# Altium PCB Motor Controller_v0.PcbDoc
Units mm, origin at the board's own origin, x right, y up, seen from the top; angles counter-clockwise.
Board outline 57 x 53.13 mm, 2 copper layers (Top Layer, Bottom Layer); 15 components, 31 nets, 110 pads, 18 vias.
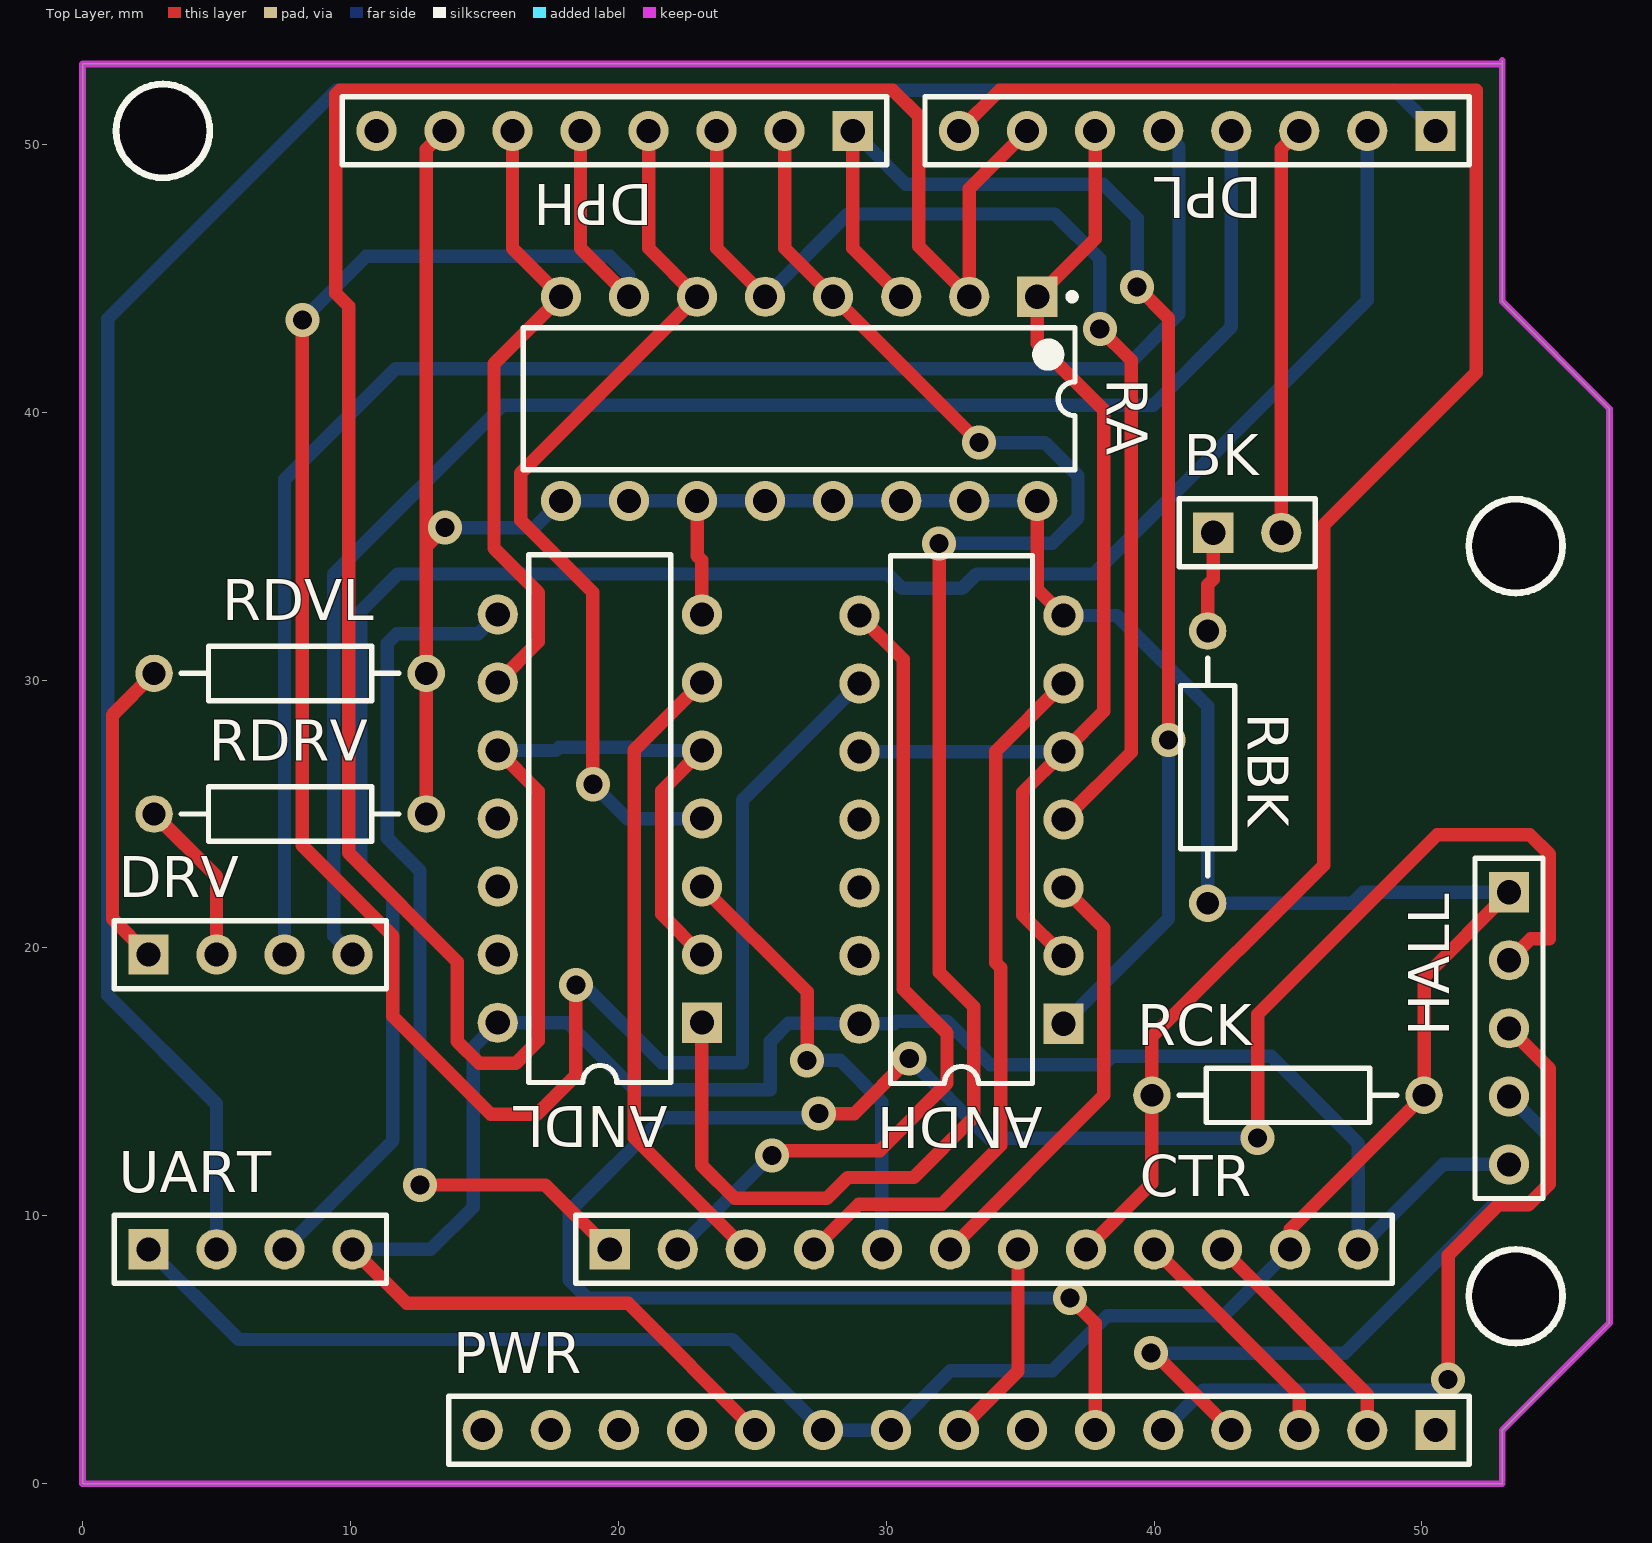
[diagram p0: Top Layer view]
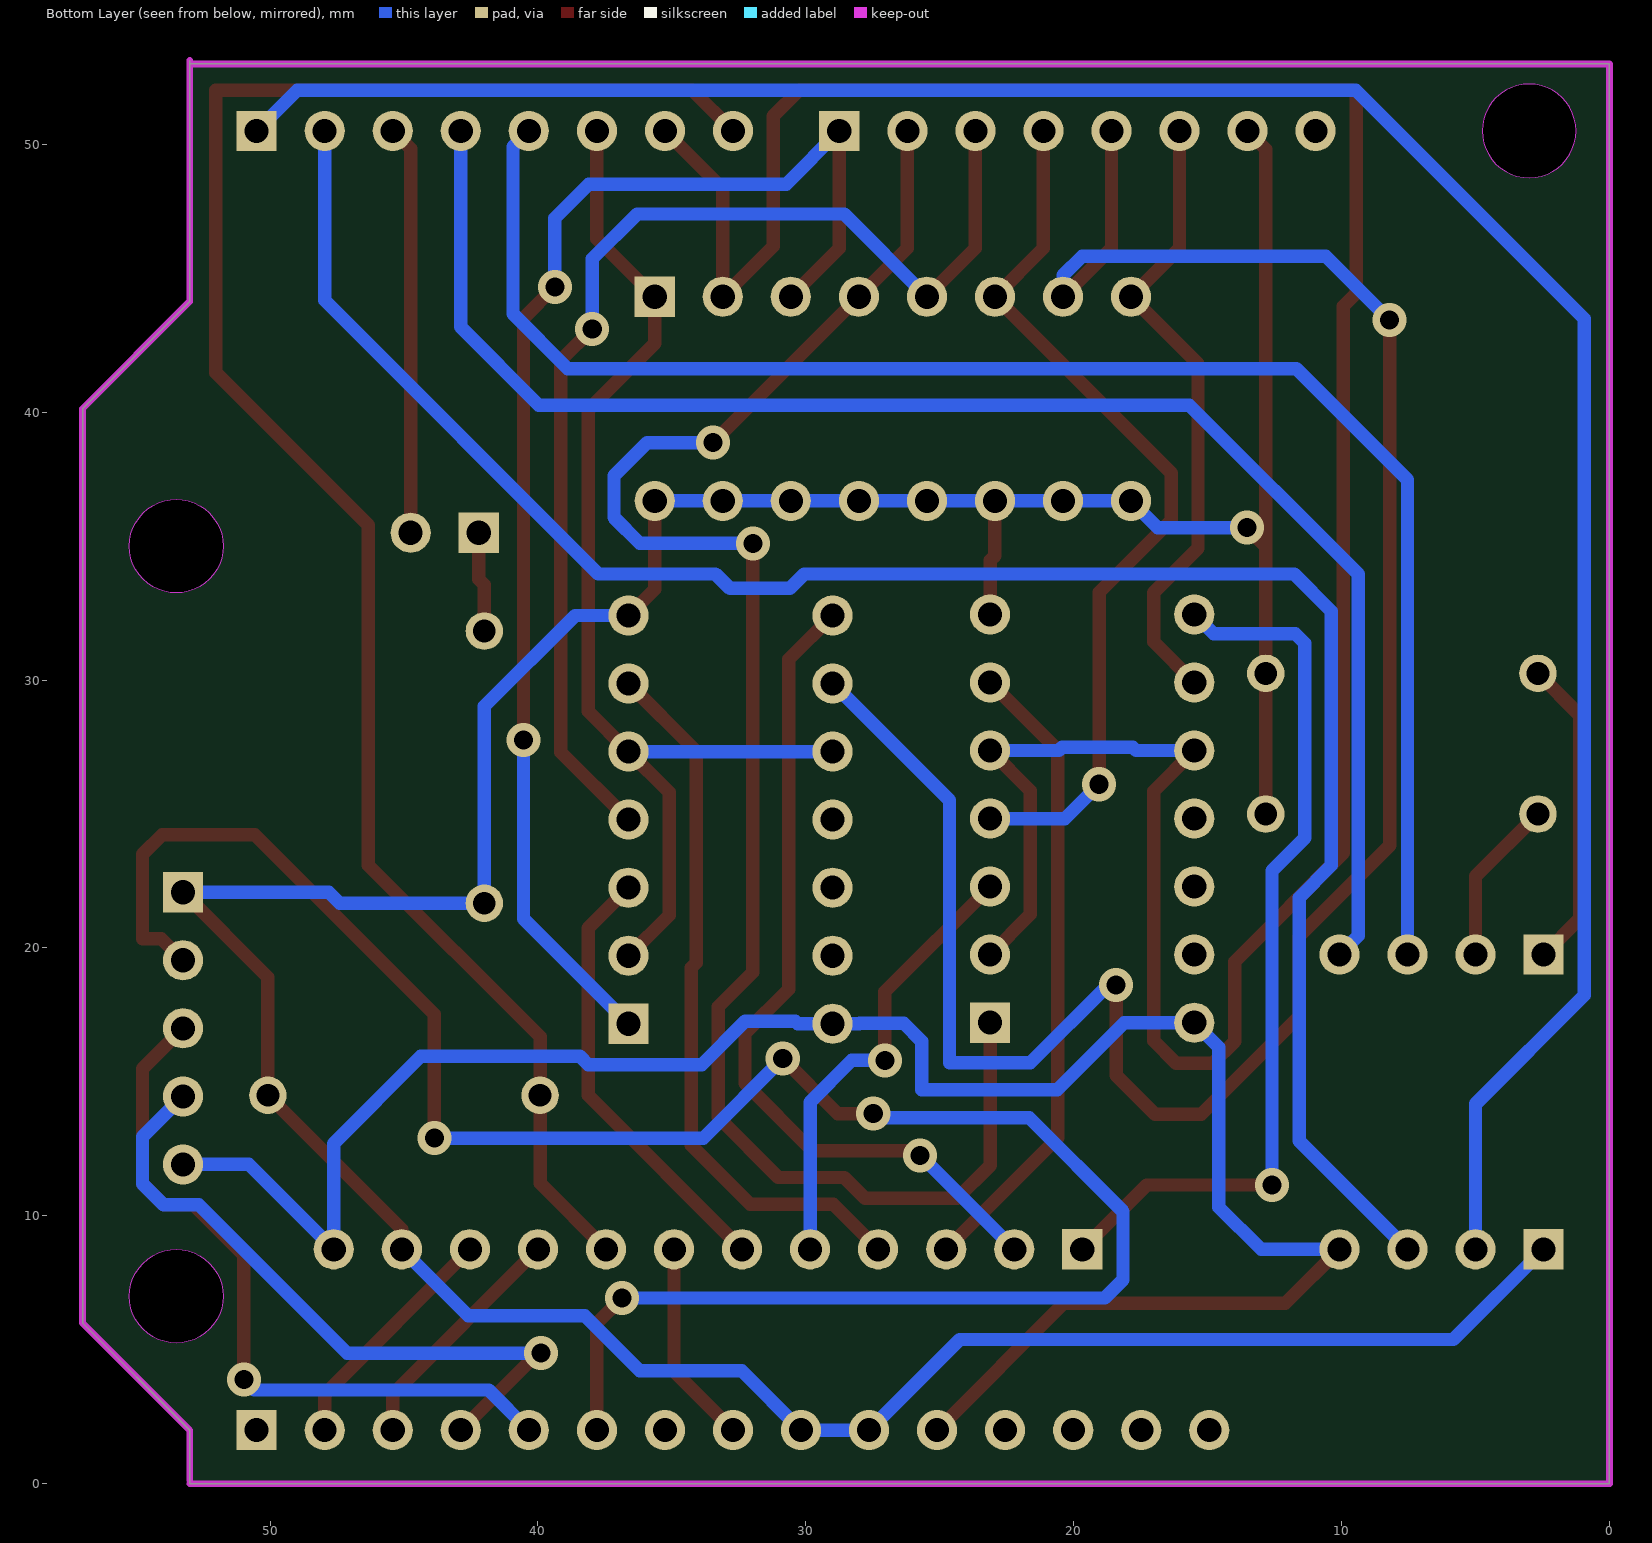
[diagram p1: Bottom Layer view, seen from below]

## Layer stack, top to bottom
Top Solder: solder mask 0.0102, Solder Resist, Dk 3.5
Top Layer: signal copper 0.0356
Dielectric 1: dielectric 0.32, FR-4, Dk 4.8
Bottom Layer: signal copper 0.0356
Bottom Solder: solder mask 0.0102, Solder Resist, Dk 3.5

## Board outline
0,0 0,53 53,53 53,53.127 53,44.127 57,40.127 57,6 53,2 53,0
cut-out: 51.75,7 ccw(c53.5,7) 53.5,5.25 ccw(c53.5,7) 55.25,7 ccw(c53.5,7) 53.5,8.75 ccw(c53.5,7)
cut-out: 51.75,35 ccw(c53.5,35) 53.5,33.25 ccw(c53.5,35) 55.25,35 ccw(c53.5,35) 53.5,36.75 ccw(c53.5,35)
cut-out: 3,48.75 cw(c3,50.5) 1.25,50.5 cw(c3,50.5) 3,52.25 cw(c3,50.5) 4.75,50.5 cw(c3,50.5)

## Design rules (kind name [scope] priority, off if disabled: settings)
Clearance [All] p1: gap=0.5 ignorepadtopadclearanceinfootprint=FALSE
PolygonConnect [All] p1: connectstyle=Relief reliefconductorwidth=0.254 reliefentries=4 polygonreliefangle="90 Angle" airgapwidth=0.254
RoutingVias [All] p1: holewidth=0.711 width=1.27 viastyle="Through Hole" minholewidth=0.711 minwidth=1.27 maxholewidth=0.711 maxwidth=1.27
SolderMaskExpansion [All] p1: expansion=0.102 istentingtop=FALSE
Width [All] p1: maxlimit=1 minlimit=0.254 preferedwidth=0.5
30 further rules are at their usual default settings.

## Components (designator, comment, footprint, x,y, rotation, side; value= is the part's Value field where it differs from the comment)
ANDH "SN74ALS08N" N014 32.81,24.79 r90 top
ANDL "SN74ALS08N" N014 19.31,24.83 r90 top
BK "Header 2" HDR1X2 42.21,35.5 r0 top
CTR "Header 12" HDR1X12 19.68,8.75 r0 top
DPH "Header 8" HDR1X8 28.75,50.5 r180 top
DPL "Header 8" HDR1X8 50.5,50.5 r180 top
DRV "Header 4" HDR1X4 2.46,19.75 r0 top
HALL "Header 5" HDR1X5 53.25,22.08 r270 top
PWR "Header 15" HDR1X15 50.5,2 r180 top
RA "Res Pack2" DIP-16 26.75,40.5 r270 top value=1K
RBK "Res2" AXIAL-0.4 42,26.75 r90 top value=1K
RCK "Res2" AXIAL-0.4 45,14.5 r180 top value=1K
RDRV "Res2" AXIAL-0.4 7.75,25 r180 top value=1K
RDVL "Res2" AXIAL-0.4 7.75,30.25 r180 top value=220
UART "Header 4" HDR1X4 2.46,8.75 r0 top

## Footprints (in the part's own frame and the unit in brackets; to place one, negate y for a bottom-side part, rotate by r counter-clockwise, add the part's x,y. Pads: shape width x height; smd on the part's side, far side on the other; paste and mask are expansions set on the pad)
AXIAL-0.4 [mm] "Axial Device, Thru-Hole; 2 Leads; 0.4 in Pin Spacing"
  round 1.4 hole 0.85: 1(-5.08,0) 2(5.08,0)
  silkscreen extent -4.06,-1.02 4.06,1.02
DIP-16 [mm] "DIP; 16 Leads; Row Spacing 7.62 mm; Pitch 2.54 mm"
  rect 1.5x1.5 hole 0.9: 1(-3.81,8.89)
  round 1.5 hole 0.9: 2(-3.81,6.35) 3(-3.81,3.81) 4(-3.81,1.27) 5(-3.81,-1.27) 6(-3.81,-3.81) 7(-3.81,-6.35) 8(-3.81,-8.89) 9(3.81,-8.89) 10(3.81,-6.35) 11(3.81,-3.81) 12(3.81,-1.27) 13(3.81,1.27) 14(3.81,3.81) 15(3.81,6.35) 16(3.81,8.89)
  silkscreen extent -3.93,-10.3 2.65,10.32, body extent -3.6,-10.28 3.6,10.28, height 5.08
HDR1X2 [mm] "Connector; Header; 2 Position"
  rect 1.5x1.5 hole 0.9: 1(0,0)
  round 1.5 hole 0.9: 2(2.54,0)
  silkscreen extent -1.27,-1.27 3.81,1.27
HDR1X4 [mm] "Connector; Header; 4 Position"
  rect 1.5x1.5 hole 0.9: 1(0,0)
  round 1.5 hole 0.9: 2(2.54,0) 3(5.08,0) 4(7.62,0)
  silkscreen extent -1.27,-1.27 8.89,1.27
HDR1X5 [mm] "Connector; Header; 5 Position"
  rect 1.5x1.5 hole 0.9: 1(0,0)
  round 1.5 hole 0.9: 2(2.54,0) 3(5.08,0) 4(7.62,0) 5(10.16,0)
  silkscreen extent -1.27,-1.27 11.43,1.27
HDR1X8 [mm] "Connector; Header; 8 Position"
  rect 1.5x1.5 hole 0.9: 1(0,0)
  round 1.5 hole 0.9: 2(2.54,0) 3(5.08,0) 4(7.62,0) 5(10.16,0) 6(12.7,0) 7(15.24,0) 8(17.78,0)
  silkscreen extent -1.27,-1.27 19.05,1.27
HDR1X12 [mm] "Connector; Header; 12 Position"
  rect 1.5x1.5 hole 0.9: 1(0,0)
  round 1.5 hole 0.9: 2(2.54,0) 3(5.08,0) 4(7.62,0) 5(10.16,0) 6(12.7,0) 7(15.24,0) 8(17.78,0) 9(20.32,0) 10(22.86,0) 11(25.4,0) 12(27.94,0)
  silkscreen extent -1.27,-1.27 29.21,1.27
HDR1X15 [mm] "Connector; Header; 15 Position"
  rect 1.5x1.5 hole 0.9: 1(0,0)
  round 1.5 hole 0.9: 2(2.54,0) 3(5.08,0) 4(7.62,0) 5(10.16,0) 6(12.7,0) 7(15.24,0) 8(17.78,0) 9(20.32,0) 10(22.86,0) 11(25.4,0) 12(27.94,0) 13(30.48,0) 14(33.02,0) 15(35.56,0)
  silkscreen extent -1.27,-1.27 36.83,1.27
N014 [mm] "DIP; 14 Leads; Row Spacing 7.62 mm; Pitch 2.54 mm"
  rect 1.5x1.5 hole 0.9: 1(-7.62,-3.81)
  round 1.5 hole 0.9: 2(-5.08,-3.81) 3(-2.54,-3.81) 4(0,-3.81) 5(2.54,-3.81) 6(5.08,-3.81) 7(7.62,-3.81) 8(7.62,3.81) 9(5.08,3.81) 10(2.54,3.81) 11(0,3.81) 12(-2.54,3.81) 13(-5.08,3.81) 14(-7.62,3.81)
  silkscreen extent -9.85,-2.65 9.85,2.65

## Part data
ANDH ANDL: "Quadruple 2-Input Positive-AND Gate", ComponentLink1Description="Manufacturer Link", ComponentLink1URL=http://www.ti.com/, ComponentLink2Description=Datasheet, ComponentLink2URL=http://www-s.ti.com/sc/ds/sn74als08.pdf, ComponentLink3Description="Packaging Specification", ComponentLink3URL=http://focus.ti.com/lit/ml/mpdi002c/mpdi002c.pdf, DatasheetVersion=Dec-1994, LatestRevisionDate=04-Mar-2005, LatestRevisionNote="Stylized 3D Model Added.", PackageDescription="DIP; 14 Leads; Row Spacing 7.62 mm; Pitch 2.54 mm", PackageReference=N014, PackageVersion=Oct-1995, Published=8-Jun-2000, Publisher="Altium Limited"
BK: "Header, 2-Pin", LatestRevisionDate=17-Jul-2002, LatestRevisionNote="Re-released for DXP Platform.", Publisher="Altium Limited"
CTR: "Header, 12-Pin", LatestRevisionDate=17-Jul-2002, LatestRevisionNote="Re-released for DXP Platform.", Publisher="Altium Limited"
DPH DPL: "Header, 8-Pin", LatestRevisionDate=17-Jul-2002, LatestRevisionNote="Re-released for DXP Platform.", Publisher="Altium Limited"
DRV UART: "Header, 4-Pin", LatestRevisionDate=17-Jul-2002, LatestRevisionNote="Re-released for DXP Platform.", Publisher="Altium Limited"
HALL: "Header, 5-Pin", LatestRevisionDate=17-Jul-2002, LatestRevisionNote="Re-released for DXP Platform.", Publisher="Altium Limited"
PWR: "Header, 15-Pin", LatestRevisionDate=17-Jul-2002, LatestRevisionNote="Re-released for DXP Platform.", Publisher="Altium Limited"
RA: "Isolated Resistor Network - Parts", Code_JEDEC=MO-001-AC, LatestRevisionDate=17-Jul-2002, LatestRevisionNote="Re-released for DXP Platform.", PackageReference=DIP-16, Published=24-Mar-1999, Publisher="Altium Limited", Sim Note="Enter the Resistance value into parameter field."
RBK RCK RDRV RDVL: "Resistor", LatestRevisionDate=17-Jul-2002, LatestRevisionNote="Re-released for DXP Platform.", PackageDescription="Axial Device, Thru-Hole; 2 Leads; 0.4 in Pin Spacing", PackageReference=AXIAL-0.4, Published=8-Jun-2000, Publisher="Altium Limited"

## Via types
v1: diameter 1.27, hole 0.711, Top Layer to Bottom Layer, 18 vias

## Nets (pads, with @x,y where several pads share a name; then routed paths per layer and width w, separated by ;. In a path a pad name is that pad's centre, name@x,y a point inside that pad or via, vN(x,y) a via of type N, cw(c..) or ccw(c..) an arc to the next point about the centre after c; other vN are vias at no path point)
BK_SW: BK.2 DPL.3 | length 15.3
  Top Layer w0.5: BK.2 44.75,49.83 DPL.3
BVS: CTR.9 PWR.3 | length 9
  Top Layer w0.5: CTR.9 45.42,3.33 PWR.3
CK: CTR.8 DPL.8 RCK.2 | length 69.2
  Top Layer w0.5: DPL.8 34.239,52.019 52.019,52.019 52.019,41.478 46.33,35.789 46.33,23.089 39.92,16.679 RCK.2 39.92,11.21 CTR.8
CS: CTR.10 PWR.2 | length 9
  Top Layer w0.5: CTR.10 47.96,3.33 PWR.2
DRIVE_LED: DPL.5 DRV.3 | length 60.8
  Bottom Layer w0.5: DRV.3 7.54,37.474 11.684,41.617 38.881,41.617 40.932,43.668 40.932,49.908 DPL.5
DRIVE_SW: DPL.4 DRV.4 | length 59.1
  Bottom Layer w0.5: DRV.4 9.38,20.45 9.38,33.96 15.683,40.263 39.963,40.263 42.88,43.18 DPL.4
GND: ANDH.7 ANDL.7 CTR.11 DPH.7 HALL.1 PWR.9 PWR.10 RA.9 RA.10 RA.11 RA.12 RA.13 RA.14 RA.15 RA.16 RBK.1 RCK.1 RDRV.1 RDVL.1 UART.1 | length 148.8
  Top Layer w0.5: RDRV.1 RDVL.1 12.83,34.979 ; DPH.7 12.83,49.82 12.83,34.979 ; v1(13.538,35.687) 12.83,34.979 ; RA.11 22.94,34.648 23.12,34.468 ANDL.7 ; RA.16 35.64,33.39 ANDH.7 ; CTR.11 45.08,9.5 RCK.1 50.08,18.91 HALL.1
  Bottom Layer w0.5: UART.1 5.825,5.385 24.255,5.385 PWR.10 PWR.9 32.396,4.216 36.195,4.216 38.252,6.274 42.604,6.274 CTR.11 ; v1(13.538,35.687) 16.857,35.687 RA.9 RA.10 RA.11 RA.12 RA.13 RA.14 RA.15 RA.16 ; ANDH.7 38.608,32.41 42,29.018 RBK.1 47.396,21.67 47.806,22.08 HALL.1
HAU: HALL.2 PWR.6 | length 79.7
  Top Layer w0.5: v1(27.483,13.818) 28.804,13.818 v1(30.861,15.875) ; v1(36.855,6.934) 37.8,5.99 PWR.6 ; v1(43.866,12.903) 43.866,17.526 50.571,24.232 54.026,24.232 54.762,23.495 54.762,20.345 54.055,20.345 HALL.2
  Bottom Layer w0.5: v1(27.483,13.818) 27.33,13.665 21.666,13.665 18.161,10.16 18.161,7.62 18.847,6.934 v1(36.855,6.934) ; v1(30.861,15.875) 33.833,12.903 v1(43.866,12.903)
HAV: HALL.3 PWR.5 | length 27.4
  Top Layer w0.5: v1(50.978,3.886) 50.978,8.534 52.857,10.414 53.975,10.414 54.762,11.201 54.762,15.488 HALL.3
  Bottom Layer w0.5: PWR.5 41.84,3.5 50.592,3.5 v1(50.978,3.886)
HAW: HALL.4 PWR.4 | length 25.6
  Top Layer w0.5: v1(39.878,4.877) 40.003,4.877 PWR.4
  Bottom Layer w0.5: v1(39.878,4.877) 47.117,4.877 52.654,10.414 53.975,10.414 54.762,11.201 54.762,12.948 HALL.4
NetBK_1: BK.1 RBK.2 | length 3.8
  Top Layer w0.5: RBK.2 42,33.553 42.21,33.763 BK.1
NetDRV_1: DRV.1 RDVL.2 | length 11.7
  Top Layer w0.5: DRV.1 1.118,21.092 1.118,28.698 RDVL.2
NetDRV_2: DRV.2 RDRV.2 | length 6.2
  Top Layer w0.5: RDRV.2 5,22.67 DRV.2
PWMH: ANDH.2 ANDH.5 ANDH.10 DPL.6 RA.1 | length 42.2
  Top Layer w0.5: ANDH.2 35.103,21.227 35.103,25.813 ANDH.5 38.125,28.835 38.125,40.08 35.64,42.565 RA.1 37.8,46.47 DPL.6
  Bottom Layer w0.5: ANDH.10 ANDH.5
PWML: ANDL.2 ANDL.5 ANDL.10 DPL.7 RA.2 | length 105.8
  Top Layer w0.5: ANDL.10 17.018,25.852 17.018,16.535 16.18,15.697 14.808,15.697 13.995,16.51 13.995,19.482 9.931,23.546 9.931,43.952 9.449,44.434 9.449,51.867 9.601,52.019 30.251,52.019 31.217,51.054 31.217,46.193 RA.2 33.1,48.34 DPL.7 ; ANDL.2 21.615,21.255 21.615,25.865 ANDL.5
  Bottom Layer w0.5: ANDL.10 17.665,27.37 17.791,27.496 20.435,27.496 20.561,27.37 ANDL.5
RX: DPL.1 UART.2 | length 90.1
  Bottom Layer w0.5: UART.2 5,14.177 0.94,18.237 0.94,43.485 9.474,52.019 48.981,52.019 DPL.1
TX: DPL.2 UART.3 | length 75.2
  Bottom Layer w0.5: UART.3 11.582,12.792 11.582,21.879 10.38,23.081 10.38,32.571 11.769,33.96 30.061,33.96 30.601,33.42 32.831,33.42 33.371,33.96 37.744,33.96 47.96,44.175 DPL.2
UH: ANDH.1 DPH.1 RA.3 | length 51.1
  Top Layer w0.5: DPH.1 28.75,46.12 RA.3 ; v1(39.37,44.679) 40.538,43.51 v1(40.538,27.762)
  Bottom Layer w0.5: DPH.1 30.736,48.514 38.1,48.514 39.37,47.244 v1(39.37,44.679) ; ANDH.1 40.538,21.088 v1(40.538,27.762)
UHG: ANDH.3 CTR.6 | length 16.5
  Top Layer w0.5: CTR.6 38.125,14.495 38.125,20.745 ANDH.3
UL: ANDL.1 DPH.2 RA.4 | length 65.2
  Top Layer w0.5: ANDL.1 23.12,11.88 24.345,10.655 27.79,10.655 28.568,11.433 31.024,11.433 33.27,13.678 33.27,17.808 31.979,19.099 v1(31.979,35.103) ; DPH.2 26.21,46.12 RA.4 v1(33.468,38.862)
  Bottom Layer w0.5: v1(31.979,35.103) 36.195,35.103 37.16,36.068 37.16,37.631 35.929,38.862 v1(33.468,38.862)
ULG: ANDL.3 CTR.5 | length 17
  Top Layer w0.5: ANDL.3 27.051,18.359 v1(27.051,15.806)
  Bottom Layer w0.5: v1(27.051,15.806) 28.283,15.806 29.84,14.249 CTR.5
VCC: ANDH.14 ANDL.14 CTR.12 HALL.5 PWR.11 UART.4 | length 78.6
  Top Layer w0.5: UART.4 12.099,6.731 20.369,6.731 PWR.11
  Bottom Layer w0.5: UART.4 13.005,8.75 14.58,10.325 14.58,16.29 ANDL.14 18.12,17.21 20.62,14.71 25.666,14.71 25.666,16.51 26.347,17.191 27.985,17.191 28.006,17.17 ANDH.14 30.306,17.17 30.398,17.263 32.27,17.263 33.886,15.646 38.125,15.646 38.43,15.951 44.369,15.951 47.62,12.7 CTR.12 50.79,11.92 HALL.5
VH: ANDH.4 DPH.3 RA.5 | length 43.9
  Top Layer w0.5: DPH.3 23.67,46.12 RA.5 ; ANDH.4 39.141,27.311 39.141,41.935 v1(37.973,43.104)
  Bottom Layer w0.5: RA.5 28.566,47.396 36.297,47.396 37.973,45.72 v1(37.973,43.104)
VHG: ANDH.6 CTR.4 | length 26.9
  Top Layer w0.5: CTR.4 28.983,10.433 32.07,10.433 34.27,12.633 34.27,19.263 34.087,19.446 34.087,27.337 ANDH.6
VIN: CTR.7 PWR.8 | length 7.7
  Top Layer w0.5: PWR.8 34.92,4.2 CTR.7
VL: ANDL.4 DPH.4 RA.6 | length 33.6
  Top Layer w0.5: v1(19.05,26.111) 19.05,33.274 16.36,35.964 16.36,37.73 RA.6 21.13,46.12 DPH.4
  Bottom Layer w0.5: v1(19.05,26.111) 20.331,24.83 ANDL.4
VLG: ANDL.6 CTR.3 | length 23.9
  Top Layer w0.5: ANDL.6 20.599,27.389 20.599,12.911 CTR.3
WH: ANDH.9 DPH.5 RA.7 | length 84.3
  Top Layer w0.5: v1(8.204,43.434) 8.204,23.825 11.582,20.447 11.582,17.45 15.24,13.792 16.967,13.792 18.415,15.24 v1(18.415,18.618) ; DPH.5 18.59,46.12 RA.7
  Bottom Layer w0.5: v1(8.204,43.434) 10.592,45.822 19.685,45.822 20.4,45.107 RA.7 ; v1(18.415,18.618) 18.707,18.618 21.615,15.71 24.638,15.71 24.638,25.508 ANDH.9
WHG: ANDH.8 CTR.2 | length 31.4
  Top Layer w0.5: v1(25.73,12.26) 25.903,12.433 29.755,12.433 32.27,14.947 32.27,16.825 30.632,18.463 30.632,30.778 ANDH.8
  Bottom Layer w0.5: CTR.2 v1(25.73,12.26)
WL: ANDL.9 DPH.6 RA.8 | length 23.7
  Top Layer w0.5: ANDL.9 17.018,31.428 17.018,33.267 15.36,34.925 15.36,41.81 RA.8 16.05,46.12 DPH.6
WLG: ANDL.8 CTR.1 | length 33.4
  Top Layer w0.5: v1(12.598,11.151) 17.279,11.151 CTR.1
  Bottom Layer w0.5: v1(12.598,11.151) 12.598,22.885 11.38,24.104 11.38,31.37 11.735,31.725 14.775,31.725 ANDL.8
pads on no net: ANDH.11 ANDH.12 ANDH.13 ANDL.11 ANDL.12 ANDL.13 DPH.8 PWR.1 PWR.7 PWR.12 PWR.13 PWR.14 PWR.15

## Keep-outs
Keep-Out Layer:
  lines w0.254: 53,0 0,0 0,53 53,53 ; 53,0.127 53,1.127 53,2 57,6 57,7.127 57,40.127 53,44.127 53,53.127

## Silkscreen, mask and mechanical layers (free items; w line width, h text height)
Top Overlay:
  circle w0.254: c3,50.5 r1.75
  circle w0.254: c53.5,35 r1.75
  circle w0.254: c53.5,7 r1.75